# Altium PCB FootSW.PcbDoc
Units mm, origin at the board's own origin, x right, y up, seen from the top; angles counter-clockwise.
Board outline 222 x 22 mm, 2 copper layers (Top Layer, Bottom Layer); 6 components, 7 nets, 53 pads, 7 vias.
Unrouted connection lines stored in the file: 11.
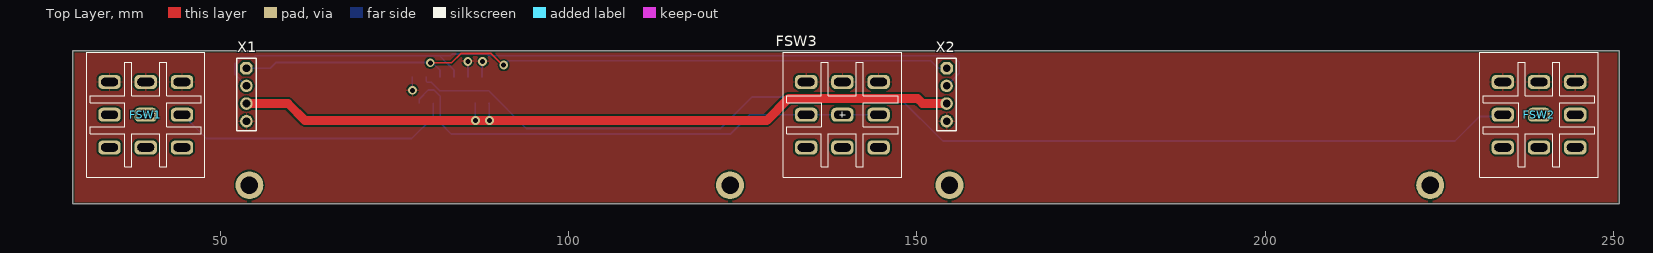
[diagram p0: Top Layer view]
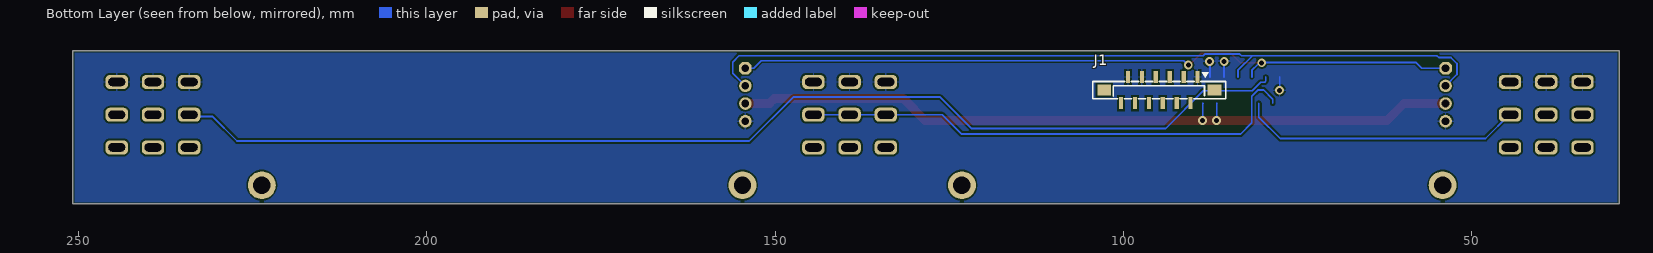
[diagram p1: Bottom Layer view, seen from below]
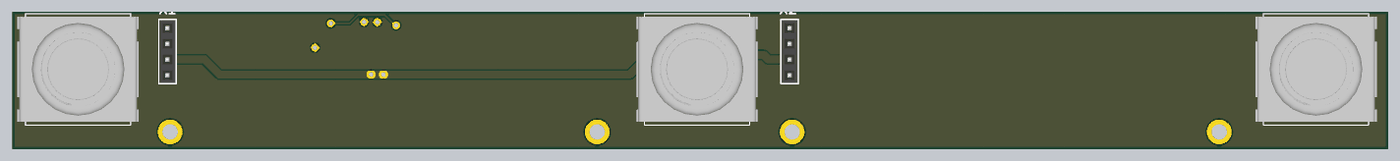
[diagram p2: 3D render of the assembled board from above, using the file's embedded part models]

## Layer stack, top to bottom
Top Solder: solder mask 0.0102, Solder Resist, Dk 3.5
Top Layer: signal copper 0.0356
Dielectric 1: dielectric 0.32, FR-4, Dk 4.8
Bottom Layer: signal copper 0.0356
Bottom Solder: solder mask 0.0102, Solder Resist, Dk 3.5

## Board outline
28.811,65.532 28.811,87.532 250.811,87.532 250.811,65.532

## Design rules (kind name [scope] priority, off if disabled: settings)
BoardOutlineClearance [All] p1: gap=0.254 ignorepadtopadclearanceinfootprint=FALSE except(0: Arc-SplitContinuation Track-SplitContinuation SMDPad-SplitContinuation THPad-SplitContinuation Via-SplitContinuation Fill-SplitContinuation Poly-SplitContinuation Region-SplitContinuation Text-SplitContinuation)
Clearance [All] p1: gap=0.254 ignorepadtopadclearanceinfootprint=FALSE
PolygonConnect [All] p1: connectstyle=Relief reliefconductorwidth=0.254 reliefentries=4 polygonreliefangle="90 Angle" airgapwidth=0.254
RoomDefinition FootSW [InComponentClass('FootSW')] p1: confinementstyle=ConfineIn formatcopy=TRUE lockcomponents=FALSE outline 0,0 50.8,0 50.8,25.4 0,25.4
RoutingVias [All] p1: holewidth=0.711 width=1.27 viastyle="Through Hole" minholewidth=0.711 minwidth=1.27 maxholewidth=0.711 maxwidth=1.27
SolderMaskExpansion [All] p1: expansion=0.102 istentingtop=FALSE
Width [All] p1: maxlimit=1.27 minlimit=0.254 preferedwidth=0.254
30 further rules are at their usual default settings.

## Classes and differential pairs
component class FootSW: FSW2 FSW3 J1 X1 X2

## Components (designator, comment, footprint, x,y, rotation, side; value= is the part's Value field where it differs from the comment)
FSW1 "FootSwitch" FOOTSW 34.092,83.051 r270 top
FSW2 "FootSwitch" FOOTSW 234.092,83.051 r270 top
FSW3 "FootSwitch" FOOTSW 134.092,83.051 r270 top
J1 "0528081271" AFA11-S12GLA-00 89.338,83.76 r0 bottom
X1 "Connector, 4pin, 2.54mm, 500VAC, 3A" "CON: PBS-4" 53.743,81.223 r270 top
X2 "Connector, 4pin, 2.54mm, 500VAC, 3A" "CON: PBS-4" 154.254,81.223 r270 top

## Footprints (in the part's own frame and the unit in brackets; to place one, negate y for a bottom-side part, rotate by r counter-clockwise, add the part's x,y. Pads: shape width x height; smd on the part's side, far side on the other; paste and mask are expansions set on the pad)
AFA11-S12GLA-00 [mm]
  rect 0.6x1.75 smd paste+0 mask+0.05: 1(0,0) 2(1,3.75) 3(2,0) 4(3,3.75) 5(4,0) 6(5,3.75) 7(6,0) 8(7,3.75) 9(8,0) 10(9,3.75) 11(10,0) 12(11,3.75)
  rect 2x1.6 smd paste+0 mask+0.05: 13(13.4,1.875) 14(-2.4,1.875)
  silkscreen extent -4.04,-0.66 15.04,3.13, body extent -3.69,-0.35 14.71,4.15, height 5.35
"CON: PBS-4" [mm] "PBS-5"
  oct 1.8x1.8 hole 1.1: 1(-3.81,0)
  round 1.8 hole 1.1: 2(-1.27,0) 3(1.27,0) 4(3.81,0)
  silkscreen extent -5.23,-1.4 5.2,1.4, body extent -5.08,-1.27 5.08,1.27, height 8.4
FOOTSW [mm]
  rrect60% 2x3.2 hole 1.2 slot 2.4 at 90 deg: 1(0,0) 2(4.7,0) 3(9.4,0) 4(0,5.2) 5(4.7,5.2) 6(9.4,5.2) 7(0,10.4) 8(4.7,10.4) 9(9.4,10.4)
  silkscreen extent -4.3,-3.3 13.7,13.7, body extent -3.81,-4.59 13.19,15.01, height 39.54

## Part data
J1: "Connector", Manufacturer_Name=Molex, Datasheet Link=https://www.molex.com/pdm_docs/sd/528082071_sd.pdf, Height=5.3mm, Manufacturer_Part_Number=0528081271, System=Connector
X1 X2: library part PBS-4, CurrentMax=3A, Manufacturer=Connfly, VoltageMax=500VAC, CommentText="\"Разъем\"", HelpURL=https://www.chipdip.ru/product/pbs-4, Multichannel=4pin, PartNumber=PBS-4, Pitch=2.54mm, TypeConnector=Connector, ValueManufacturerPartNumber="Connector, 4pin, 2.54mm, 500VAC, 3A"

## Free pads (board coordinates)
  round 4 hole 2.5: 1(54.168,68.225) 1(123.166,68.225) 1(154.668,68.225) 1(223.666,68.225)

## Via types
v1: diameter 1.27, hole 0.711, Top Layer to Bottom Layer, 7 vias

## Nets (pads, with @x,y where several pads share a name; then routed paths per layer and width w, separated by ;. In a path a pad name is that pad's centre, name@x,y a point inside that pad or via, vN(x,y) a via of type N, cw(c..) or ccw(c..) an arc to the next point about the centre after c; other vN are vias at no path point)
+5V: J1.10 J1.12 X1.3 X2.3 | length 108.2
  Top Layer w1.27: X1.3 53.749,79.959 59.715,79.959 62.17,77.505 86.628,77.505 v1(88.63,77.505) 128.407,77.505 131.597,80.696 150.063,80.696 150.806,79.953 X2.3
  Bottom Layer w0.254: 86.55,80.01 86.589,79.971 86.589,77.568 v1(86.628,77.529) ; 88.55,80.01 88.59,79.97 88.59,77.545 v1(88.63,77.505)
FOOT1: FSW1.2 FSW1.5 FSW1.8 J1.4 | length 41.3
  Bottom Layer w0.254: FSW1.8@43.992,78.351 44.592,78.351 48.013,74.93 77.47,74.93 80.55,78.01 80.55,80.01
FOOT2: FSW3.2 FSW3.5 FSW3.8 J1.2 | length 73.1
  Bottom Layer w0.254: 78.55,80.01 78.55,80.585 79.88,81.915 80.638,81.915 81.561,80.992 81.561,77.189 83.185,75.565 123.19,75.565 125.976,78.351 FSW3.2 FSW3.5 FSW3.8
FOOT3: FSW2.2 FSW2.5 FSW2.8 J1.3 | length 164.5
  Bottom Layer w0.254: 79.55,83.76 79.55,83.185 79.723,83.012 80.259,83.012 81.483,81.788 88.519,81.788 93.955,76.352 121.768,76.352 126.289,80.874 147.396,80.874 153.695,74.574 227.228,74.574 230.759,78.105 234.347,78.105 FSW2.2@234.592,78.351
GND: FSW1.1 FSW1.4 FSW1.7 FSW2.1 FSW2.4 FSW2.7 FSW3.1 FSW3.4 FSW3.7 J1.1 J1.9 J1.11 X1.4 X2.4 | length 6.4
  Bottom Layer w0.254: 77.55,83.76 77.563,83.747 77.563,81.869 v1(77.577,81.856) ; v1(85.52,86.006) 85.535,85.991 85.535,83.775 85.55,83.76 ; 87.55,83.76 87.576,83.786 87.576,85.887 87.652,85.963 v1(87.652,85.987)
SCL\: J1.7 X1.2 X2.2 | length 117
  Bottom Layer w0.254: X1.2 52.118,84.119 52.118,85.695 52.981,86.559 54.727,86.559 54.985,86.817 81.458,86.817 ; 83.55,83.76 83.55,84.725 81.458,86.817 ; X2.2 156.083,84.322 156.083,85.903 155.169,86.817 88.544,86.817 88.31,87.052 83.278,87.052 83.044,86.817 81.458,86.817
SDA: J1.5 X1.1 X2.1 | length 105.6
  Top Layer w0.254: v1(80.137,85.801) 83.188,85.801 84.512,87.125 88.865,87.125 90.519,85.471 v1(90.678,85.471)
  Bottom Layer w0.254: X1.1 57.177,85.033 57.999,85.856 80.082,85.856 v1(80.137,85.801) 80.331,85.607 80.674,85.607 81.55,84.731 81.55,83.76 ; v1(90.678,85.471) 91.313,86.106 151.994,86.106 153.066,85.033 X2.1
pads on no net: FSW1.3 FSW1.6 FSW1.9 FSW2.3 FSW2.6 FSW2.9 FSW3.3 FSW3.6 FSW3.9 J1.6 J1.8 J1.13 J1.14

## Polygon pours and split planes (outlines as drawn)
GND on Top Layer "NONET_L01_P-001" (solid, remove dead copper, pour order 1): 28.753,87.554 28.854,87.452 28.854,65.481 250.85,65.481 250.876,65.507 250.825,65.557 250.825,87.579
GND on Bottom Layer "NONET_L01_P-001" (solid, remove dead copper, pour order 0): 28.753,87.554 28.854,87.452 28.854,65.481 250.85,65.481 250.876,65.507 250.825,65.557 250.825,87.579

## Silkscreen, mask and mechanical layers (free items; w line width, h text height)
Board Shape:
  the board outline again, w0.254
Mechanical 4:
  circle w0.013: c154.518,94.225 r1.25
  circle w0.013: c154.668,68.225 r1.25
  circle w0.013: c223.517,94.621 r1.25
  circle w0.013: c223.666,68.622 r1.25
  circle w0.013: c123.166,68.622 r1.25
  circle w0.013: c123.017,94.621 r1.25
  circle w0.013: c54.168,68.225 r1.25
  circle w0.013: c54.018,94.225 r1.25
  circle w0.013: c239.792,78.351 r6
  circle w0.013: c38.792,78.351 r6
  circle w0.013: c139.292,78.351 r6
  lines w0.013: 53.768,68.225 54.568,68.225 ; 54.168,67.825 54.168,68.625 ; 89.162,61.485 89.162,70.375 ; 122.766,68.622 123.566,68.622 ; 123.166,68.222 123.166,69.022 ; 154.268,68.225 155.068,68.225 ; 154.668,67.825 154.668,68.625 ; 189.662,61.485 189.662,70.375 ; 223.266,68.622 224.066,68.622 ; 223.666,68.222 223.666,69.022 ; 52.563,86.416 52.623,76.017 ; 52.563,86.416 54.863,86.43 ; 52.563,86.416 54.923,76.03 ; 52.623,76.017 54.923,76.03 ; 52.623,76.017 54.863,86.43 ; 54.863,86.43 54.923,76.03 ; 153.063,86.416 155.423,76.03 ; 153.063,86.416 155.363,86.43 ; 153.063,86.416 153.123,76.017 ; 153.123,76.017 155.363,86.43 ; 153.123,76.017 155.423,76.03 ; 155.363,86.43 155.423,76.03 ; 51.504,96.711 125.503,97.135 125.681,66.136 51.682,65.711 51.504,96.711 ; 61.17,72.632 ccw(c62.17,72.632) 62.17,71.632 115.19,71.632 ccw(c115.19,72.632) 116.19,72.632 116.19,83.732 ccw(c115.19,83.732) 115.19,84.732 62.17,84.732 ccw(c62.17,83.732) 61.17,83.732 61.17,72.632 ; 152.004,96.711 152.182,65.711 226.181,66.136 226.003,97.135 152.004,96.711 ; 161.495,72.632 ccw(c162.495,72.632) 162.495,71.632 215.515,71.632 ccw(c215.515,72.632) 216.515,72.632 216.515,83.732 ccw(c215.515,83.732) 215.515,84.732 162.495,84.732 ccw(c162.495,83.732) 161.495,83.732 161.495,72.632 ; 161.67,72.632 ccw(c162.67,72.632) 162.67,71.632 215.69,71.632 ccw(c215.69,72.632) 216.69,72.632 216.69,83.732 ccw(c215.69,83.732) 215.69,84.732 162.67,84.732 ccw(c162.67,83.732) 161.67,83.732 161.67,72.632
  lines w0.025: 62.342,63.97 62.342,88.485 ; 62.792,63.716 250.749,63.716 ; 62.792,88.231 250.749,88.231 ; 162.842,63.97 162.842,88.485
  lines w0.1: 39.292,78.351 139.292,78.351 239.292,78.351 ; 88.592,76.312 88.592,78.605 ; 88.592,78.234 88.592,81.423 ; 189.092,76.312 189.092,78.605 ; 189.092,78.234 189.092,81.423
  lines w0.127: 250.749,63.716 250.749,88.231